# Altium PCB Ender-3.PcbDoc (part 4 of 14)
Units mil, origin at the board's own origin, x right, y up, seen from the top; angles counter-clockwise.
Board outline 3970.48 x 2769.68 mil, 2 copper layers (TopLayer, BottomLayer); 146 components, 136 nets, 669 pads, 614 vias.
Unrouted connection lines stored in the file: 1.
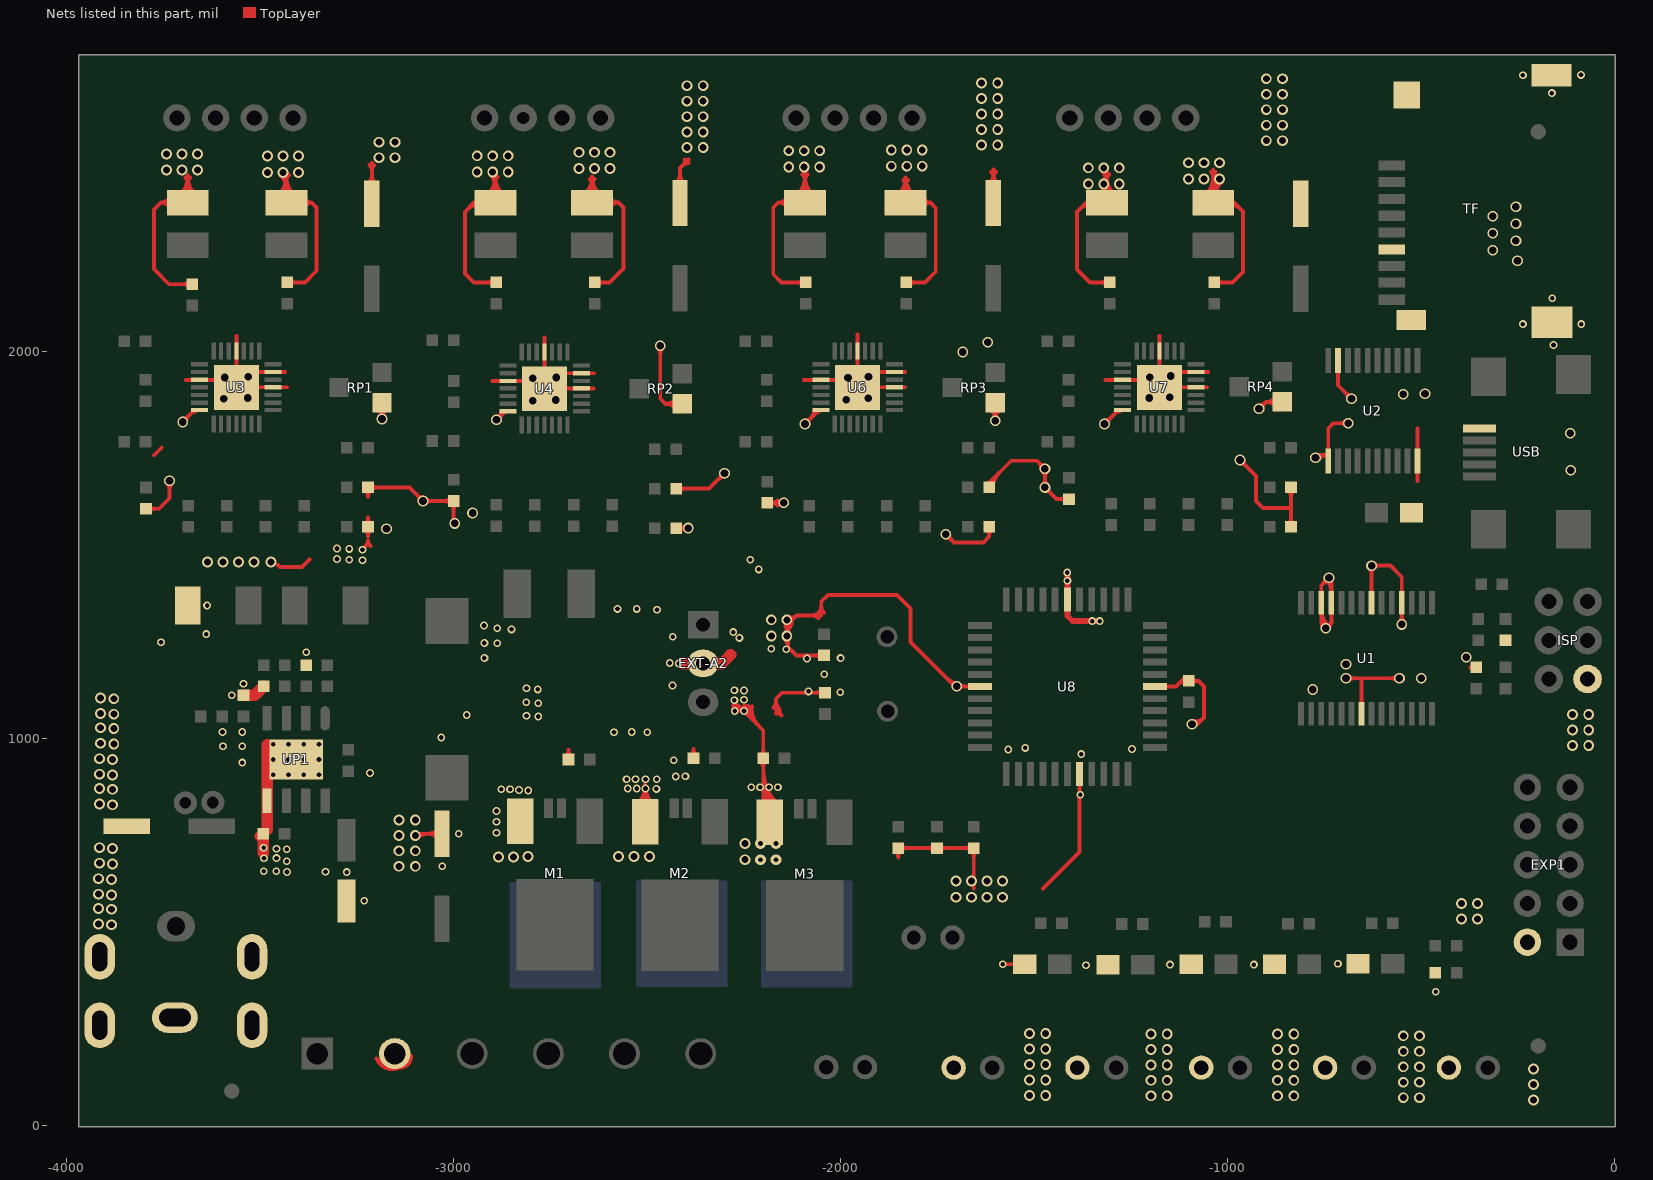
[diagram p4: the nets of this part, all layers, seen from the top]

## Via types
v1: diameter 28, hole 18, TopLayer to BottomLayer, tented both sides, 246 vias
v2: diameter 27.56, hole 19.68, TopLayer to BottomLayer, tented both sides, 196 vias
v3: diameter 20, hole 12, TopLayer to BottomLayer, tented both sides, 124 vias
v4: diameter 27.56, hole 11.81, TopLayer to BottomLayer, tented bottom, 16 vias
v5: diameter 27.56, hole 19.68, TopLayer to BottomLayer, 16 vias
v6: diameter 20, hole 12, TopLayer to BottomLayer, 12 vias
v7: diameter 28, hole 11.81, TopLayer to BottomLayer, tented both sides, 4 vias

## Nets (pads, with @x,y where several pads share a name; then routed paths per layer and width w, separated by ;. In a path a pad name is that pad's centre, name@x,y a point inside that pad or via, vN(x,y) a via of type N, cw(c..) or ccw(c..) an arc to the next point about the centre after c; other vN are vias at no path point) (continued)
GND: (continued)
  TopLayer w10: -2702.54,970.98 ccw(c-2678.39,970.98) R10.2@-2695.46,953.91 ; -2702.54,970.98 ccw(c-2678.39,970.98) R10.2@-2695.46,953.91 ; -2702.54,970.98 ccw(c-2678.39,970.98) R10.2@-2695.46,953.91 ; -2702.54,970.98 ccw(c-2678.39,970.98) R10.2@-2695.46,953.91 ; -2702.54,970.98 ccw(c-2678.39,970.98) R10.2@-2695.46,953.91 ; S4.2@-2661.21,2405.77 ccw(c-2707.69,2452.84) -2641.54,2452.84 ; S4.2@-2661.21,2405.77 ccw(c-2707.69,2452.84) -2641.54,2452.84 ; S4.2@-2661.21,2405.77 ccw(c-2707.69,2452.84) -2641.54,2452.84 ; S4.2@-2661.21,2405.77 ccw(c-2707.69,2452.84) -2641.54,2452.84 ; S4.2@-2661.21,2405.77 ccw(c-2707.69,2452.84) -2641.54,2452.84 ; S4.2@-2661.21,2405.77 ccw(c-2707.69,2452.84) -2641.54,2452.84 ; S4.2@-2661.21,2405.77 ccw(c-2707.69,2452.84) -2641.54,2452.84 ; S4.2@-2661.21,2405.77 ccw(c-2707.69,2452.84) -2641.54,2452.84 ; S4.2@-2661.21,2405.77 ccw(c-2707.69,2452.84) -2641.54,2452.84 ; S4.2@-2654.18,2398.65 ccw(c-2684.06,2428.91) -2641.54,2428.91 ; S4.2@-2654.18,2398.65 ccw(c-2684.06,2428.91) -2641.54,2428.91 ; S4.2@-2654.18,2398.65 ccw(c-2684.06,2428.91) -2641.54,2428.91 ; S4.2@-2654.18,2398.65 ccw(c-2684.06,2428.91) -2641.54,2428.91 ; S4.2@-2654.18,2398.65 ccw(c-2684.06,2428.91) -2641.54,2428.91 ; S4.2@-2654.18,2398.65 ccw(c-2684.06,2428.91) -2641.54,2428.91 ; S4.2@-2654.18,2398.65 ccw(c-2684.06,2428.91) -2641.54,2428.91 ; S4.2@-2654.18,2398.65 ccw(c-2684.06,2428.91) -2641.54,2428.91 ; S4.2@-2654.18,2398.65 ccw(c-2684.06,2428.91) -2641.54,2428.91 ; -2647.74,2446.63 cw(c-2662.73,2431.65) -2641.54,2431.65 ; -2647.74,2446.63 cw(c-2662.73,2431.65) -2641.54,2431.65 ; -2647.74,2446.63 cw(c-2662.73,2431.65) -2641.54,2431.65 ; -2647.74,2446.63 cw(c-2662.73,2431.65) -2641.54,2431.65 ; -2647.74,2446.63 cw(c-2662.73,2431.65) -2641.54,2431.65 ; -2647.74,2446.63 cw(c-2662.73,2431.65) -2641.54,2431.65 ; -2647.74,2446.63 cw(c-2662.73,2431.65) -2641.54,2431.65 ; -2647.74,2446.63 cw(c-2662.73,2431.65) -2641.54,2431.65 ; -2641.54,2428.91 ccw(c-2599.01,2428.91) S4.2@-2628.89,2398.65 ; -2641.54,2428.91 ccw(c-2599.01,2428.91) S4.2@-2628.89,2398.65 ; -2641.54,2428.91 ccw(c-2599.01,2428.91) S4.2@-2628.89,2398.65 ; -2641.54,2428.91 ccw(c-2599.01,2428.91) S4.2@-2628.89,2398.65 ; -2641.54,2428.91 ccw(c-2599.01,2428.91) S4.2@-2628.89,2398.65 ; -2641.54,2428.91 ccw(c-2599.01,2428.91) S4.2@-2628.89,2398.65 ; -2641.54,2428.91 ccw(c-2599.01,2428.91) S4.2@-2628.89,2398.65 ; -2641.54,2428.91 ccw(c-2599.01,2428.91) S4.2@-2628.89,2398.65 ; -2641.54,2428.91 ccw(c-2599.01,2428.91) S4.2@-2628.89,2398.65 ; -2641.54,2431.65 cw(c-2620.34,2431.65) -2635.33,2446.63 ; -2641.54,2431.65 cw(c-2620.34,2431.65) -2635.33,2446.63 ; -2641.54,2431.65 cw(c-2620.34,2431.65) -2635.33,2446.63 ; -2641.54,2431.65 cw(c-2620.34,2431.65) -2635.33,2446.63 ; -2641.54,2431.65 cw(c-2620.34,2431.65) -2635.33,2446.63 ; -2641.54,2431.65 cw(c-2620.34,2431.65) -2635.33,2446.63 ; -2641.54,2431.65 cw(c-2620.34,2431.65) -2635.33,2446.63 ; -2641.54,2431.65 cw(c-2620.34,2431.65) -2635.33,2446.63 ; -2641.54,2452.84 ccw(c-2575.38,2452.84) S4.2@-2621.86,2405.77 ; -2641.54,2452.84 ccw(c-2575.38,2452.84) S4.2@-2621.86,2405.77 ; -2641.54,2452.84 ccw(c-2575.38,2452.84) S4.2@-2621.86,2405.77 ; -2641.54,2452.84 ccw(c-2575.38,2452.84) S4.2@-2621.86,2405.77 ; -2641.54,2452.84 ccw(c-2575.38,2452.84) S4.2@-2621.86,2405.77 ; -2641.54,2452.84 ccw(c-2575.38,2452.84) S4.2@-2621.86,2405.77 ; -2641.54,2452.84 ccw(c-2575.38,2452.84) S4.2@-2621.86,2405.77 ; -2641.54,2452.84 ccw(c-2575.38,2452.84) S4.2@-2621.86,2405.77 ; -2641.54,2452.84 ccw(c-2575.38,2452.84) S4.2@-2621.86,2405.77 ; -2641.54,2452.84 S4.2@-2641.54,2385.84 -2573.54,2385.84 ; C16.2@-2627.46,2172.77 cw(c-2610.39,2155.7) -2610.39,2179.84 ; C16.2@-2627.46,2172.77 cw(c-2610.39,2155.7) -2610.39,2179.84 ; C16.2@-2627.46,2172.77 cw(c-2610.39,2155.7) -2610.39,2179.84 ; C16.2@-2627.46,2172.77 cw(c-2610.39,2155.7) -2610.39,2179.84 ; C16.2@-2627.46,2172.77 cw(c-2610.39,2155.7) -2610.39,2179.84 ; C16.2@-2627.46,2172.77 cw(c-2610.39,2155.7) -2610.39,2179.84 ; C16.2@-2627.46,2172.77 cw(c-2610.39,2155.7) -2610.39,2179.84 ; C16.2@-2627.46,2172.77 cw(c-2610.39,2155.7) -2610.39,2179.84 ; C16.2@-2627.46,2172.77 cw(c-2610.39,2155.7) -2610.39,2179.84 ; C16.2@-2627.46,2186.91 ccw(c-2610.39,2203.98) -2610.39,2179.84 ; C16.2@-2627.46,2186.91 ccw(c-2610.39,2203.98) -2610.39,2179.84 ; C16.2@-2627.46,2186.91 ccw(c-2610.39,2203.98) -2610.39,2179.84 ; C16.2@-2627.46,2186.91 ccw(c-2610.39,2203.98) -2610.39,2179.84 ; C16.2@-2627.46,2186.91 ccw(c-2610.39,2203.98) -2610.39,2179.84 ; C16.2@-2627.46,2186.91 ccw(c-2610.39,2203.98) -2610.39,2179.84 ; C16.2@-2627.46,2186.91 ccw(c-2610.39,2203.98) -2610.39,2179.84 ; C16.2@-2627.46,2186.91 ccw(c-2610.39,2203.98) -2610.39,2179.84 ; C16.2@-2627.46,2186.91 ccw(c-2610.39,2203.98) -2610.39,2179.84 ; S4.2@-2595.91,2372.51 cw(c-2573.54,2360.4) -2573.54,2385.84 ; S4.2@-2595.91,2372.51 cw(c-2573.54,2360.4) -2573.54,2385.84 ; S4.2@-2595.91,2372.51 cw(c-2573.54,2360.4) -2573.54,2385.84 ; S4.2@-2595.91,2372.51 cw(c-2573.54,2360.4) -2573.54,2385.84 ; S4.2@-2595.91,2372.51 cw(c-2573.54,2360.4) -2573.54,2385.84 ; S4.2@-2595.91,2372.51 cw(c-2573.54,2360.4) -2573.54,2385.84 ; S4.2@-2595.91,2372.51 cw(c-2573.54,2360.4) -2573.54,2385.84 ; S4.2@-2595.91,2372.51 cw(c-2573.54,2360.4) -2573.54,2385.84 ; S4.2@-2595.91,2372.51 cw(c-2573.54,2360.4) -2573.54,2385.84 ; S4.2@-2595.91,2399.17 ccw(c-2573.54,2411.29) -2573.54,2385.84 ; S4.2@-2595.91,2399.17 ccw(c-2573.54,2411.29) -2573.54,2385.84 ; S4.2@-2595.91,2399.17 ccw(c-2573.54,2411.29) -2573.54,2385.84 ; S4.2@-2595.91,2399.17 ccw(c-2573.54,2411.29) -2573.54,2385.84 ; S4.2@-2595.91,2399.17 ccw(c-2573.54,2411.29) -2573.54,2385.84 ; S4.2@-2595.91,2399.17 ccw(c-2573.54,2411.29) -2573.54,2385.84 ; S4.2@-2595.91,2399.17 ccw(c-2573.54,2411.29) -2573.54,2385.84 ; S4.2@-2595.91,2399.17 ccw(c-2573.54,2411.29) -2573.54,2385.84 ; S4.2@-2595.91,2399.17 ccw(c-2573.54,2411.29) -2573.54,2385.84 ; M2.3@-2525.04,831.35 ccw(c-2574.55,880.85) v3@-2504.54,880.85 ; M2.3@-2525.04,831.35 ccw(c-2574.55,880.85) v3@-2504.54,880.85 ; M2.3@-2525.04,831.35 ccw(c-2574.55,880.85) v3@-2504.54,880.85 ; M2.3@-2525.04,831.35 ccw(c-2574.55,880.85) v3@-2504.54,880.85 ; M2.3@-2525.04,831.35 ccw(c-2574.55,880.85) v3@-2504.54,880.85 ; M2.3@-2525.04,831.35 ccw(c-2574.55,880.85) v3@-2504.54,880.85 ; M2.3@-2525.04,831.35 ccw(c-2574.55,880.85) v3@-2504.54,880.85 ; M2.3@-2525.04,831.35 ccw(c-2574.55,880.85) v3@-2504.54,880.85 ; M2.3@-2525.04,831.35 ccw(c-2574.55,880.85) v3@-2504.54,880.85 ; M2.3@-2517.97,824.28 ccw(c-2550.41,856.71) -2504.54,856.71 ; M2.3@-2517.97,824.28 ccw(c-2550.41,856.71) -2504.54,856.71 ; M2.3@-2517.97,824.28 ccw(c-2550.41,856.71) -2504.54,856.71 ; M2.3@-2517.97,824.28 ccw(c-2550.41,856.71) -2504.54,856.71 ; M2.3@-2517.97,824.28 ccw(c-2550.41,856.71) -2504.54,856.71 ; M2.3@-2517.97,824.28 ccw(c-2550.41,856.71) -2504.54,856.71 ; M2.3@-2517.97,824.28 ccw(c-2550.41,856.71) -2504.54,856.71 ; M2.3@-2517.97,824.28 ccw(c-2550.41,856.71) -2504.54,856.71 ; M2.3@-2517.97,824.28 ccw(c-2550.41,856.71) -2504.54,856.71 ; -2504.54,856.71 ccw(c-2458.67,856.71) M2.3@-2491.1,824.28 ; -2504.54,856.71 ccw(c-2458.67,856.71) M2.3@-2491.1,824.28 ; -2504.54,856.71 ccw(c-2458.67,856.71) M2.3@-2491.1,824.28 ; -2504.54,856.71 ccw(c-2458.67,856.71) M2.3@-2491.1,824.28 ; -2504.54,856.71 ccw(c-2458.67,856.71) M2.3@-2491.1,824.28 ; -2504.54,856.71 ccw(c-2458.67,856.71) M2.3@-2491.1,824.28 ; -2504.54,856.71 ccw(c-2458.67,856.71) M2.3@-2491.1,824.28 ; -2504.54,856.71 ccw(c-2458.67,856.71) M2.3@-2491.1,824.28 ; -2504.54,856.71 ccw(c-2458.67,856.71) M2.3@-2491.1,824.28 ; v3@-2504.54,880.85 ccw(c-2434.52,880.85) M2.3@-2484.03,831.35 ; v3@-2504.54,880.85 ccw(c-2434.52,880.85) M2.3@-2484.03,831.35 ; v3@-2504.54,880.85 ccw(c-2434.52,880.85) M2.3@-2484.03,831.35 ; v3@-2504.54,880.85 ccw(c-2434.52,880.85) M2.3@-2484.03,831.35 ; v3@-2504.54,880.85 ccw(c-2434.52,880.85) M2.3@-2484.03,831.35 ; v3@-2504.54,880.85 ccw(c-2434.52,880.85) M2.3@-2484.03,831.35 ; v3@-2504.54,880.85 ccw(c-2434.52,880.85) M2.3@-2484.03,831.35 ; v3@-2504.54,880.85 ccw(c-2434.52,880.85) M2.3@-2484.03,831.35 ; v3@-2504.54,880.85 ccw(c-2434.52,880.85) M2.3@-2484.03,831.35 ; v2@-2471.74,2009.63 cw(c-2486.73,1994.65) -2465.54,1994.65 ; v2@-2471.74,2009.63 cw(c-2486.73,1994.65) -2465.54,1994.65 ; v2@-2471.74,2009.63 cw(c-2486.73,1994.65) -2465.54,1994.65 ; v2@-2471.74,2009.63 cw(c-2486.73,1994.65) -2465.54,1994.65 ; v2@-2471.74,2009.63 cw(c-2486.73,1994.65) -2465.54,1994.65 ; v2@-2471.74,2009.63 cw(c-2486.73,1994.65) -2465.54,1994.65 ; v2@-2471.74,2009.63 cw(c-2486.73,1994.65) -2465.54,1994.65 ; v2@-2471.74,2009.63 cw(c-2486.73,1994.65) -2465.54,1994.65 ; v2@-2471.74,2009.63 cw(c-2486.73,1994.65) -2465.54,1994.65 ; -2465.54,1994.65 cw(c-2444.34,1994.65) v2@-2459.33,2009.63 ; -2465.54,1994.65 cw(c-2444.34,1994.65) v2@-2459.33,2009.63 ; -2465.54,1994.65 cw(c-2444.34,1994.65) v2@-2459.33,2009.63 ; -2465.54,1994.65 cw(c-2444.34,1994.65) v2@-2459.33,2009.63 ; -2465.54,1994.65 cw(c-2444.34,1994.65) v2@-2459.33,2009.63 ; -2465.54,1994.65 cw(c-2444.34,1994.65) v2@-2459.33,2009.63 ; -2465.54,1994.65 cw(c-2444.34,1994.65) v2@-2459.33,2009.63 ; -2465.54,1994.65 cw(c-2444.34,1994.65) v2@-2459.33,2009.63 ; -2465.54,1994.65 cw(c-2444.34,1994.65) v2@-2459.33,2009.63 ; -2451.53,1865.84 cw(c-2451.53,1829.62) RP2.2@-2423.83,1852.96 ; -2451.53,1865.84 ccw(c-2451.53,1902.06) RP2.2@-2423.83,1878.73 ; -2451.53,1865.84 cw(c-2451.53,1829.62) RP2.2@-2423.83,1852.96 ; -2451.53,1865.84 ccw(c-2451.53,1902.06) RP2.2@-2423.83,1878.73 ; -2451.53,1865.84 cw(c-2451.53,1829.62) RP2.2@-2423.83,1852.96 ; -2451.53,1865.84 ccw(c-2451.53,1902.06) RP2.2@-2423.83,1878.73 ; -2451.53,1865.84 cw(c-2451.53,1829.62) RP2.2@-2423.83,1852.96 ; -2451.53,1865.84 ccw(c-2451.53,1902.06) RP2.2@-2423.83,1878.73 ; -2451.53,1865.84 cw(c-2451.53,1829.62) RP2.2@-2423.83,1852.96 ; -2451.53,1865.84 ccw(c-2451.53,1902.06) RP2.2@-2423.83,1878.73 ; -2451.53,1865.84 ccw(c-2451.53,1902.06) RP2.2@-2423.83,1878.73 ; -2451.53,1865.84 cw(c-2451.53,1829.62) RP2.2@-2423.83,1852.96 ; -2451.53,1865.84 ccw(c-2451.53,1902.06) RP2.2@-2423.83,1878.73 ; -2451.53,1865.84 cw(c-2451.53,1829.62) RP2.2@-2423.83,1852.96 ; -2451.53,1865.84 ccw(c-2451.53,1902.06) RP2.2@-2423.83,1878.73 ; -2451.53,1865.84 cw(c-2451.53,1829.62) RP2.2@-2423.83,1852.96 ; -2451.53,1865.84 ccw(c-2451.53,1902.06) RP2.2@-2423.83,1878.73 ; -2451.53,1865.84 cw(c-2451.53,1829.62) RP2.2@-2423.83,1852.96 ; C2.2@-2425.14,2435.45 ccw(c-2450.75,2461.06) -2414.54,2461.06 ; C2.2@-2425.14,2435.45 ccw(c-2450.75,2461.06) -2414.54,2461.06 ; C2.2@-2425.14,2435.45 ccw(c-2450.75,2461.06) -2414.54,2461.06 ; C2.2@-2425.14,2435.45 ccw(c-2450.75,2461.06) -2414.54,2461.06 ; C2.2@-2425.14,2435.45 ccw(c-2450.75,2461.06) -2414.54,2461.06 ; C2.2@-2425.14,2435.45 ccw(c-2450.75,2461.06) -2414.54,2461.06 ; C2.2@-2425.14,2435.45 ccw(c-2450.75,2461.06) -2414.54,2461.06 ; C2.2@-2425.14,2435.45 ccw(c-2450.75,2461.06) -2414.54,2461.06 ; C2.2@-2425.14,2435.45 ccw(c-2450.75,2461.06) -2414.54,2461.06 ; R17.2@-2417.46,1537.77 cw(c-2400.39,1520.7) v2@-2400.39,1544.84 ; R17.2@-2417.46,1537.77 cw(c-2400.39,1520.7) v2@-2400.39,1544.84 ; R17.2@-2417.46,1537.77 cw(c-2400.39,1520.7) v2@-2400.39,1544.84 ; R17.2@-2417.46,1537.77 cw(c-2400.39,1520.7) v2@-2400.39,1544.84 ; R17.2@-2417.46,1537.77 cw(c-2400.39,1520.7) v2@-2400.39,1544.84 ; R17.2@-2417.46,1537.77 cw(c-2400.39,1520.7) v2@-2400.39,1544.84 ; R17.2@-2417.46,1537.77 cw(c-2400.39,1520.7) v2@-2400.39,1544.84 ; R17.2@-2417.46,1537.77 cw(c-2400.39,1520.7) v2@-2400.39,1544.84 ; R17.2@-2417.46,1537.77 cw(c-2400.39,1520.7) v2@-2400.39,1544.84 ; R17.2@-2417.46,1551.91 ccw(c-2400.39,1568.98) v2@-2400.39,1544.84 ; R17.2@-2417.46,1551.91 ccw(c-2400.39,1568.98) v2@-2400.39,1544.84 ; R17.2@-2417.46,1551.91 ccw(c-2400.39,1568.98) v2@-2400.39,1544.84 ; R17.2@-2417.46,1551.91 ccw(c-2400.39,1568.98) v2@-2400.39,1544.84 ; R17.2@-2417.46,1551.91 ccw(c-2400.39,1568.98) v2@-2400.39,1544.84 ; R17.2@-2417.46,1551.91 ccw(c-2400.39,1568.98) v2@-2400.39,1544.84 ; R17.2@-2417.46,1551.91 ccw(c-2400.39,1568.98) v2@-2400.39,1544.84 ; R17.2@-2417.46,1551.91 ccw(c-2400.39,1568.98) v2@-2400.39,1544.84 ; R17.2@-2417.46,1551.91 ccw(c-2400.39,1568.98) v2@-2400.39,1544.84 ; C17.2@-2417.46,1639.77 cw(c-2400.39,1622.7) -2400.39,1646.84 ; C17.2@-2417.46,1639.77 cw(c-2400.39,1622.7) -2400.39,1646.84 ; C17.2@-2417.46,1639.77 cw(c-2400.39,1622.7) -2400.39,1646.84 ; C17.2@-2417.46,1639.77 cw(c-2400.39,1622.7) -2400.39,1646.84 ; C17.2@-2417.46,1639.77 cw(c-2400.39,1622.7) -2400.39,1646.84 ; C17.2@-2417.46,1639.77 cw(c-2400.39,1622.7) -2400.39,1646.84 ; C17.2@-2417.46,1639.77 cw(c-2400.39,1622.7) -2400.39,1646.84 ; C17.2@-2417.46,1639.77 cw(c-2400.39,1622.7) -2400.39,1646.84 ; C17.2@-2417.46,1639.77 cw(c-2400.39,1622.7) -2400.39,1646.84 ; C17.2@-2417.46,1653.91 ccw(c-2400.39,1670.98) -2400.39,1646.84 ; C17.2@-2417.46,1653.91 ccw(c-2400.39,1670.98) -2400.39,1646.84 ; C17.2@-2417.46,1653.91 ccw(c-2400.39,1670.98) -2400.39,1646.84 ; C17.2@-2417.46,1653.91 ccw(c-2400.39,1670.98) -2400.39,1646.84 ; C17.2@-2417.46,1653.91 ccw(c-2400.39,1670.98) -2400.39,1646.84 ; C17.2@-2417.46,1653.91 ccw(c-2400.39,1670.98) -2400.39,1646.84 ; C17.2@-2417.46,1653.91 ccw(c-2400.39,1670.98) -2400.39,1646.84 ; C17.2@-2417.46,1653.91 ccw(c-2400.39,1670.98) -2400.39,1646.84 ; C17.2@-2417.46,1653.91 ccw(c-2400.39,1670.98) -2400.39,1646.84 ; R17.2@-2414.73,1544.84 cw(c-2414.73,1523.65) v2@-2399.74,1538.63 ; R17.2@-2414.73,1544.84 ccw(c-2414.73,1566.04) v2@-2399.74,1551.05 ; R17.2@-2414.73,1544.84 cw(c-2414.73,1523.65) v2@-2399.74,1538.63 ; R17.2@-2414.73,1544.84 ccw(c-2414.73,1566.04) v2@-2399.74,1551.05 ; R17.2@-2414.73,1544.84 cw(c-2414.73,1523.65) v2@-2399.74,1538.63 ; R17.2@-2414.73,1544.84 ccw(c-2414.73,1566.04) v2@-2399.74,1551.05 ; R17.2@-2414.73,1544.84 cw(c-2414.73,1523.65) v2@-2399.74,1538.63 ; R17.2@-2414.73,1544.84 ccw(c-2414.73,1566.04) v2@-2399.74,1551.05 ; R17.2@-2414.73,1544.84 cw(c-2414.73,1523.65) v2@-2399.74,1538.63 ; R17.2@-2414.73,1544.84 ccw(c-2414.73,1566.04) v2@-2399.74,1551.05 ; R17.2@-2414.73,1544.84 ccw(c-2414.73,1566.04) v2@-2399.74,1551.05 ; R17.2@-2414.73,1544.84 cw(c-2414.73,1523.65) v2@-2399.74,1538.63 ; R17.2@-2414.73,1544.84 ccw(c-2414.73,1566.04) v2@-2399.74,1551.05 ; R17.2@-2414.73,1544.84 cw(c-2414.73,1523.65) v2@-2399.74,1538.63 ; R17.2@-2414.73,1544.84 ccw(c-2414.73,1566.04) v2@-2399.74,1551.05 ; R17.2@-2414.73,1544.84 cw(c-2414.73,1523.65) v2@-2399.74,1538.63 ; R17.2@-2414.73,1544.84 ccw(c-2414.73,1566.04) v2@-2399.74,1551.05 ; R17.2@-2414.73,1544.84 cw(c-2414.73,1523.65) v2@-2399.74,1538.63 ; -2414.54,2461.06 ccw(c-2378.32,2461.06) C2.2@-2403.93,2435.45 ; -2414.54,2461.06 ccw(c-2378.32,2461.06) C2.2@-2403.93,2435.45 ; -2414.54,2461.06 ccw(c-2378.32,2461.06) C2.2@-2403.93,2435.45 ; -2414.54,2461.06 ccw(c-2378.32,2461.06) C2.2@-2403.93,2435.45 ; -2414.54,2461.06 ccw(c-2378.32,2461.06) C2.2@-2403.93,2435.45 ; -2414.54,2461.06 ccw(c-2378.32,2461.06) C2.2@-2403.93,2435.45 ; -2414.54,2461.06 ccw(c-2378.32,2461.06) C2.2@-2403.93,2435.45 ; -2414.54,2461.06 ccw(c-2378.32,2461.06) C2.2@-2403.93,2435.45 ; -2414.54,2461.06 ccw(c-2378.32,2461.06) C2.2@-2403.93,2435.45 ; -2407.52,2481.85 cw(c-2392.54,2466.87) -2392.54,2488.06 ; -2407.52,2481.85 ccw(c-2422.51,2496.84) -2401.31,2496.84 ; -2407.52,2481.85 cw(c-2392.54,2466.87) -2392.54,2488.06 ; -2407.52,2481.85 ccw(c-2422.51,2496.84) -2401.31,2496.84 ; -2407.52,2481.85 cw(c-2392.54,2466.87) -2392.54,2488.06 ; -2407.52,2481.85 ccw(c-2422.51,2496.84) -2401.31,2496.84 ; -2407.52,2481.85 cw(c-2392.54,2466.87) -2392.54,2488.06 ; -2407.52,2481.85 ccw(c-2422.51,2496.84) -2401.31,2496.84 ; -2407.52,2481.85 cw(c-2392.54,2466.87) -2392.54,2488.06 ; -2407.52,2481.85 ccw(c-2422.51,2496.84) -2401.31,2496.84 ; -2407.52,2481.85 ccw(c-2422.51,2496.84) -2401.31,2496.84 ; -2407.52,2481.85 cw(c-2392.54,2466.87) -2392.54,2488.06 ; -2407.52,2481.85 ccw(c-2422.51,2496.84) -2401.31,2496.84 ; -2407.52,2481.85 cw(c-2392.54,2466.87) -2392.54,2488.06 ; -2407.52,2481.85 ccw(c-2422.51,2496.84) -2401.31,2496.84 ; -2407.52,2481.85 cw(c-2392.54,2466.87) -2392.54,2488.06 ; R11.2@-2386.61,956.91 ccw(c-2403.68,973.98) -2379.54,973.98 ; R11.2@-2386.61,956.91 ccw(c-2403.68,973.98) -2379.54,973.98 ; R11.2@-2386.61,956.91 ccw(c-2403.68,973.98) -2379.54,973.98 ; R11.2@-2386.61,956.91 ccw(c-2403.68,973.98) -2379.54,973.98 ; R11.2@-2386.61,956.91 ccw(c-2403.68,973.98) -2379.54,973.98 ; R11.2@-2386.61,956.91 ccw(c-2403.68,973.98) -2379.54,973.98 ; R11.2@-2386.61,956.91 ccw(c-2403.68,973.98) -2379.54,973.98 ; R11.2@-2386.61,956.91 ccw(c-2403.68,973.98) -2379.54,973.98 ; R11.2@-2386.61,956.91 ccw(c-2403.68,973.98) -2379.54,973.98 ; -2379.54,973.98 ccw(c-2355.39,973.98) R11.2@-2372.46,956.91 ; -2379.54,973.98 ccw(c-2355.39,973.98) R11.2@-2372.46,956.91 ; -2379.54,973.98 ccw(c-2355.39,973.98) R11.2@-2372.46,956.91 ; -2379.54,973.98 ccw(c-2355.39,973.98) R11.2@-2372.46,956.91 ; -2379.54,973.98 ccw(c-2355.39,973.98) R11.2@-2372.46,956.91 ; -2379.54,973.98 ccw(c-2355.39,973.98) R11.2@-2372.46,956.91 ; -2379.54,973.98 ccw(c-2355.39,973.98) R11.2@-2372.46,956.91 ; -2379.54,973.98 ccw(c-2355.39,973.98) R11.2@-2372.46,956.91 ; -2379.54,973.98 ccw(c-2355.39,973.98) R11.2@-2372.46,956.91 ; -2314.52,1671.85 cw(c-2299.54,1656.87) v2@-2299.54,1678.06 ; -2314.52,1671.85 ccw(c-2329.51,1686.84) v2@-2308.31,1686.84 ; -2314.52,1671.85 cw(c-2299.54,1656.87) v2@-2299.54,1678.06 ; -2314.52,1671.85 ccw(c-2329.51,1686.84) v2@-2308.31,1686.84 ; -2314.52,1671.85 cw(c-2299.54,1656.87) v2@-2299.54,1678.06 ; -2314.52,1671.85 ccw(c-2329.51,1686.84) v2@-2308.31,1686.84 ; -2314.52,1671.85 cw(c-2299.54,1656.87) v2@-2299.54,1678.06 ; -2314.52,1671.85 ccw(c-2329.51,1686.84) v2@-2308.31,1686.84 ; -2314.52,1671.85 cw(c-2299.54,1656.87) v2@-2299.54,1678.06 ; -2314.52,1671.85 ccw(c-2329.51,1686.84) v2@-2308.31,1686.84 ; -2314.52,1671.85 ccw(c-2329.51,1686.84) v2@-2308.31,1686.84 ; -2314.52,1671.85 cw(c-2299.54,1656.87) v2@-2299.54,1678.06 ; -2314.52,1671.85 ccw(c-2329.51,1686.84) v2@-2308.31,1686.84 ; -2314.52,1671.85 cw(c-2299.54,1656.87) v2@-2299.54,1678.06 ; -2314.52,1671.85 ccw(c-2329.51,1686.84) v2@-2308.31,1686.84 ; -2314.52,1671.85 cw(c-2299.54,1656.87) v2@-2299.54,1678.06 ; -2314.52,1671.85 ccw(c-2329.51,1686.84) v2@-2308.31,1686.84 ; -2314.52,1671.85 cw(c-2299.54,1656.87) v2@-2299.54,1678.06 ; -2259.54,1073.06 cw(c-2259.54,1051.87) v3@-2244.55,1066.85 ; -2259.54,1073.06 cw(c-2259.54,1051.87) v3@-2244.55,1066.85 ; -2259.54,1073.06 cw(c-2259.54,1051.87) v3@-2244.55,1066.85 ; -2259.54,1073.06 cw(c-2259.54,1051.87) v3@-2244.55,1066.85 ; -2259.54,1073.06 cw(c-2259.54,1051.87) v3@-2244.55,1066.85 ; -2259.54,1073.06 cw(c-2259.54,1051.87) v3@-2244.55,1066.85 ; -2259.54,1073.06 cw(c-2259.54,1051.87) v3@-2244.55,1066.85 ; -2259.54,1073.06 cw(c-2259.54,1051.87) v3@-2244.55,1066.85 ; -2250.76,1081.84 ccw(c-2229.56,1081.84) v3@-2244.55,1066.85 ; -2250.76,1081.84 ccw(c-2229.56,1081.84) v3@-2244.55,1066.85 ; -2250.76,1081.84 ccw(c-2229.56,1081.84) v3@-2244.55,1066.85 ; -2250.76,1081.84 ccw(c-2229.56,1081.84) v3@-2244.55,1066.85 ; -2250.76,1081.84 ccw(c-2229.56,1081.84) v3@-2244.55,1066.85 ; -2250.76,1081.84 ccw(c-2229.56,1081.84) v3@-2244.55,1066.85 ; -2250.76,1081.84 ccw(c-2229.56,1081.84) v3@-2244.55,1066.85 ; -2250.76,1081.84 ccw(c-2229.56,1081.84) v3@-2244.55,1066.85 ; R12.2@-2206.61,942.77 cw(c-2223.68,925.7) -2199.54,925.7 ; R12.2@-2206.61,942.77 cw(c-2223.68,925.7) -2199.54,925.7 ; R12.2@-2206.61,942.77 cw(c-2223.68,925.7) -2199.54,925.7 ; R12.2@-2206.61,942.77 cw(c-2223.68,925.7) -2199.54,925.7 ; R12.2@-2206.61,942.77 cw(c-2223.68,925.7) -2199.54,925.7 ; R12.2@-2206.61,942.77 cw(c-2223.68,925.7) -2199.54,925.7 ; R12.2@-2206.61,942.77 cw(c-2223.68,925.7) -2199.54,925.7 ; R12.2@-2206.61,942.77 cw(c-2223.68,925.7) -2199.54,925.7 ; R12.2@-2206.61,942.77 cw(c-2223.68,925.7) -2199.54,925.7 ; R12.2@-2206.61,956.91 ccw(c-2223.68,973.98) -2199.54,973.98 ; R12.2@-2206.61,956.91 ccw(c-2223.68,973.98) -2199.54,973.98 ; R12.2@-2206.61,956.91 ccw(c-2223.68,973.98) -2199.54,973.98 ; R12.2@-2206.61,956.91 ccw(c-2223.68,973.98) -2199.54,973.98 ; R12.2@-2206.61,956.91 ccw(c-2223.68,973.98) -2199.54,973.98 ; R12.2@-2206.61,956.91 ccw(c-2223.68,973.98) -2199.54,973.98 ; R12.2@-2206.61,956.91 ccw(c-2223.68,973.98) -2199.54,973.98 ; R12.2@-2206.61,956.91 ccw(c-2223.68,973.98) -2199.54,973.98 ; R12.2@-2206.61,956.91 ccw(c-2223.68,973.98) -2199.54,973.98 ; -2199.54,848.47 ccw(c-2143.91,848.47) M3.3@-2183.24,809.14 ; -2199.54,848.47 ccw(c-2143.91,848.47) M3.3@-2183.24,809.14 ; -2199.54,848.47 ccw(c-2143.91,848.47) M3.3@-2183.24,809.14 ; -2199.54,848.47 ccw(c-2143.91,848.47) M3.3@-2183.24,809.14 ; -2199.54,848.47 ccw(c-2143.91,848.47) M3.3@-2183.24,809.14 ; -2199.54,848.47 ccw(c-2143.91,848.47) M3.3@-2183.24,809.14 ; -2199.54,848.47 ccw(c-2143.91,848.47) M3.3@-2183.24,809.14 ; -2199.54,848.47 ccw(c-2143.91,848.47) M3.3@-2183.24,809.14 ; -2199.54,848.47 ccw(c-2143.91,848.47) M3.3@-2183.24,809.14 ; v3@-2199.54,872.61 ccw(c-2119.77,872.61) M3.3@-2176.17,816.21 ; v3@-2199.54,872.61 ccw(c-2119.77,872.61) M3.3@-2176.17,816.21 ; v3@-2199.54,872.61 ccw(c-2119.77,872.61) M3.3@-2176.17,816.21 ; v3@-2199.54,872.61 ccw(c-2119.77,872.61) M3.3@-2176.17,816.21 ; v3@-2199.54,872.61 ccw(c-2119.77,872.61) M3.3@-2176.17,816.21 ; v3@-2199.54,872.61 ccw(c-2119.77,872.61) M3.3@-2176.17,816.21 ; v3@-2199.54,872.61 ccw(c-2119.77,872.61) M3.3@-2176.17,816.21 ; v3@-2199.54,872.61 ccw(c-2119.77,872.61) M3.3@-2176.17,816.21 ; v3@-2199.54,872.61 ccw(c-2119.77,872.61) M3.3@-2176.17,816.21 ; -2199.54,896.75 ccw(c-2095.62,896.75) M3.3@-2169.1,823.28 ; -2199.54,896.75 ccw(c-2095.62,896.75) M3.3@-2169.1,823.28 ; -2199.54,896.75 ccw(c-2095.62,896.75) M3.3@-2169.1,823.28 ; -2199.54,896.75 ccw(c-2095.62,896.75) M3.3@-2169.1,823.28 ; -2199.54,896.75 ccw(c-2095.62,896.75) M3.3@-2169.1,823.28 ; -2199.54,896.75 ccw(c-2095.62,896.75) M3.3@-2169.1,823.28 ; -2199.54,896.75 ccw(c-2095.62,896.75) M3.3@-2169.1,823.28 ; -2199.54,896.75 ccw(c-2095.62,896.75) M3.3@-2169.1,823.28 ; -2199.54,896.75 ccw(c-2095.62,896.75) M3.3@-2169.1,823.28 ; -2199.54,920.9 ccw(c-2071.48,920.9) M3.3@-2162.03,830.35 ; -2199.54,920.9 ccw(c-2071.48,920.9) M3.3@-2162.03,830.35 ; -2199.54,920.9 ccw(c-2071.48,920.9) M3.3@-2162.03,830.35 ; -2199.54,920.9 ccw(c-2071.48,920.9) M3.3@-2162.03,830.35 ; -2199.54,920.9 ccw(c-2071.48,920.9) M3.3@-2162.03,830.35 ; -2199.54,920.9 ccw(c-2071.48,920.9) M3.3@-2162.03,830.35 ; -2199.54,920.9 ccw(c-2071.48,920.9) M3.3@-2162.03,830.35 ; -2199.54,920.9 ccw(c-2071.48,920.9) M3.3@-2162.03,830.35 ; -2199.54,920.9 ccw(c-2071.48,920.9) M3.3@-2162.03,830.35 ; -2199.54,925.7 cw(c-2175.39,925.7) R12.2@-2192.46,942.77 ; -2199.54,925.7 cw(c-2175.39,925.7) R12.2@-2192.46,942.77 ; -2199.54,925.7 cw(c-2175.39,925.7) R12.2@-2192.46,942.77 ; -2199.54,925.7 cw(c-2175.39,925.7) R12.2@-2192.46,942.77 ; -2199.54,925.7 cw(c-2175.39,925.7) R12.2@-2192.46,942.77 ; -2199.54,925.7 cw(c-2175.39,925.7) R12.2@-2192.46,942.77 ; -2199.54,925.7 cw(c-2175.39,925.7) R12.2@-2192.46,942.77 ; -2199.54,925.7 cw(c-2175.39,925.7) R12.2@-2192.46,942.77 ; -2199.54,925.7 cw(c-2175.39,925.7) R12.2@-2192.46,942.77 ; -2199.54,973.98 ccw(c-2175.39,973.98) R12.2@-2192.46,956.91 ; -2199.54,973.98 ccw(c-2175.39,973.98) R12.2@-2192.46,956.91 ; -2199.54,973.98 ccw(c-2175.39,973.98) R12.2@-2192.46,956.91 ; -2199.54,973.98 ccw(c-2175.39,973.98) R12.2@-2192.46,956.91 ; -2199.54,973.98 ccw(c-2175.39,973.98) R12.2@-2192.46,956.91 ; -2199.54,973.98 ccw(c-2175.39,973.98) R12.2@-2192.46,956.91 ; -2199.54,973.98 ccw(c-2175.39,973.98) R12.2@-2192.46,956.91 ; -2199.54,973.98 ccw(c-2175.39,973.98) R12.2@-2192.46,956.91 ; -2199.54,973.98 ccw(c-2175.39,973.98) R12.2@-2192.46,956.91 ; C38.2@-2182.46,1602.77 cw(c-2165.39,1585.7) -2165.39,1609.84 ; C38.2@-2182.46,1602.77 cw(c-2165.39,1585.7) -2165.39,1609.84 ; C38.2@-2182.46,1602.77 cw(c-2165.39,1585.7) -2165.39,1609.84 ; C38.2@-2182.46,1602.77 cw(c-2165.39,1585.7) -2165.39,1609.84 ; C38.2@-2182.46,1602.77 cw(c-2165.39,1585.7) -2165.39,1609.84 ; C38.2@-2182.46,1602.77 cw(c-2165.39,1585.7) -2165.39,1609.84 ; C38.2@-2182.46,1602.77 cw(c-2165.39,1585.7) -2165.39,1609.84 ; C38.2@-2182.46,1602.77 cw(c-2165.39,1585.7) -2165.39,1609.84 ; C38.2@-2182.46,1602.77 cw(c-2165.39,1585.7) -2165.39,1609.84 ; C38.2@-2182.46,1616.91 ccw(c-2165.39,1633.98) -2165.39,1609.84 ; C38.2@-2182.46,1616.91 ccw(c-2165.39,1633.98) -2165.39,1609.84 ; C38.2@-2182.46,1616.91 ccw(c-2165.39,1633.98) -2165.39,1609.84 ; C38.2@-2182.46,1616.91 ccw(c-2165.39,1633.98) -2165.39,1609.84 ; C38.2@-2182.46,1616.91 ccw(c-2165.39,1633.98) -2165.39,1609.84 ; C38.2@-2182.46,1616.91 ccw(c-2165.39,1633.98) -2165.39,1609.84 ; C38.2@-2182.46,1616.91 ccw(c-2165.39,1633.98) -2165.39,1609.84 ; C38.2@-2182.46,1616.91 ccw(c-2165.39,1633.98) -2165.39,1609.84 ; C38.2@-2182.46,1616.91 ccw(c-2165.39,1633.98) -2165.39,1609.84 ; C38.2@-2177.73,1609.84 cw(c-2177.73,1588.65) -2162.74,1603.63 ccw(c-2177.73,1588.65) C38.2@-2177.73,1609.84 ; C38.2@-2177.73,1609.84 ccw(c-2177.73,1631.04) -2162.74,1616.05 cw(c-2177.73,1631.04) C38.2@-2177.73,1609.84 ; -2172.74,1081.05 ccw(c-2187.73,1096.04) -2166.54,1096.04 ; -2172.74,1081.05 ccw(c-2187.73,1096.04) -2166.54,1096.04 ; -2172.74,1081.05 ccw(c-2187.73,1096.04) -2166.54,1096.04 ; -2172.74,1081.05 ccw(c-2187.73,1096.04) -2166.54,1096.04 ; -2172.74,1081.05 ccw(c-2187.73,1096.04) -2166.54,1096.04 ; -2172.74,1081.05 ccw(c-2187.73,1096.04) -2166.54,1096.04 ; -2167.73,1609.84 cw(c-2167.73,1588.65) v2@-2152.74,1603.63 ; -2167.73,1609.84 ccw(c-2167.73,1631.04) v2@-2152.74,1616.05 ; -2167.73,1609.84 cw(c-2167.73,1588.65) v2@-2152.74,1603.63 ; -2167.73,1609.84 ccw(c-2167.73,1631.04) v2@-2152.74,1616.05 ; -2167.73,1609.84 cw(c-2167.73,1588.65) v2@-2152.74,1603.63 ; -2167.73,1609.84 ccw(c-2167.73,1631.04) v2@-2152.74,1616.05 ; -2167.73,1609.84 cw(c-2167.73,1588.65) v2@-2152.74,1603.63 ; -2167.73,1609.84 ccw(c-2167.73,1631.04) v2@-2152.74,1616.05 ; -2167.73,1609.84 ccw(c-2167.73,1631.04) v2@-2152.74,1616.05 ; -2167.73,1609.84 cw(c-2167.73,1588.65) v2@-2152.74,1603.63 ; -2167.73,1609.84 ccw(c-2167.73,1631.04) v2@-2152.74,1616.05 ; -2167.73,1609.84 cw(c-2167.73,1588.65) v2@-2152.74,1603.63 ; -2167.73,1609.84 ccw(c-2167.73,1631.04) v2@-2152.74,1616.05 ; -2167.73,1609.84 cw(c-2167.73,1588.65) v2@-2152.74,1603.63 ; -2166.54,1096.04 ccw(c-2145.34,1096.04) -2160.33,1081.05 ; -2166.54,1096.04 ccw(c-2145.34,1096.04) -2160.33,1081.05 ; -2166.54,1096.04 ccw(c-2145.34,1096.04) -2160.33,1081.05 ; -2166.54,1096.04 ccw(c-2145.34,1096.04) -2160.33,1081.05 ; -2166.54,1096.04 ccw(c-2145.34,1096.04) -2160.33,1081.05 ; -2166.54,1096.04 ccw(c-2145.34,1096.04) -2160.33,1081.05 ; -2160.53,2385.84 cw(c-2160.53,2358.7) S5.2@-2136.91,2372.06 ; -2160.53,2385.84 ccw(c-2160.53,2412.98) S5.2@-2136.91,2399.62 ; -2160.53,2385.84 cw(c-2160.53,2358.7) S5.2@-2136.91,2372.06 ; -2160.53,2385.84 ccw(c-2160.53,2412.98) S5.2@-2136.91,2399.62 ; -2160.53,2385.84 cw(c-2160.53,2358.7) S5.2@-2136.91,2372.06 ; -2160.53,2385.84 ccw(c-2160.53,2412.98) S5.2@-2136.91,2399.62 ; -2160.53,2385.84 cw(c-2160.53,2358.7) S5.2@-2136.91,2372.06 ; -2160.53,2385.84 ccw(c-2160.53,2412.98) S5.2@-2136.91,2399.62 ; -2160.53,2385.84 cw(c-2160.53,2358.7) S5.2@-2136.91,2372.06 ; -2160.53,2385.84 ccw(c-2160.53,2412.98) S5.2@-2136.91,2399.62 ; -2160.53,2385.84 ccw(c-2160.53,2412.98) S5.2@-2136.91,2399.62 ; -2160.53,2385.84 cw(c-2160.53,2358.7) S5.2@-2136.91,2372.06 ; -2160.53,2385.84 ccw(c-2160.53,2412.98) S5.2@-2136.91,2399.62 ; -2160.53,2385.84 cw(c-2160.53,2358.7) S5.2@-2136.91,2372.06 ; -2160.53,2385.84 ccw(c-2160.53,2412.98) S5.2@-2136.91,2399.62 ; -2160.53,2385.84 cw(c-2160.53,2358.7) S5.2@-2136.91,2372.06 ; -2160.53,2385.84 ccw(c-2160.53,2412.98) S5.2@-2136.91,2399.62 ; -2160.53,2385.84 cw(c-2160.53,2358.7) S5.2@-2136.91,2372.06 ; -2151.55,1059.85 cw(c-2136.56,1074.84) -2157.76,1074.84 ccw(c-2136.56,1074.84) -2151.55,1059.85 ; -2151.55,1059.85 ccw(c-2166.54,1044.87) -2166.54,1066.06 cw(c-2166.54,1044.87) -2151.55,1059.85 ; -2141.74,1290.63 cw(c-2156.73,1275.65) v1@-2135.54,1275.65 ; -2141.74,1290.63 cw(c-2156.73,1275.65) v1@-2135.54,1275.65 ; -2141.74,1290.63 cw(c-2156.73,1275.65) v1@-2135.54,1275.65 ; -2141.74,1290.63 cw(c-2156.73,1275.65) v1@-2135.54,1275.65 ; -2141.74,1290.63 cw(c-2156.73,1275.65) v1@-2135.54,1275.65 ; -2141.74,1290.63 cw(c-2156.73,1275.65) v1@-2135.54,1275.65 ; v1@-2135.54,1275.65 cw(c-2114.34,1275.65) -2129.33,1290.63 ; v1@-2135.54,1275.65 cw(c-2114.34,1275.65) -2129.33,1290.63 ; v1@-2135.54,1275.65 cw(c-2114.34,1275.65) -2129.33,1290.63 ; v1@-2135.54,1275.65 cw(c-2114.34,1275.65) -2129.33,1290.63 ; v1@-2135.54,1275.65 cw(c-2114.34,1275.65) -2129.33,1290.63 ; v1@-2135.54,1275.65 cw(c-2114.34,1275.65) -2129.33,1290.63 ; v1@-2135.54,1305.62 ccw(c-2135.54,1326.82) -2120.55,1311.83 ; v1@-2135.54,1305.62 ccw(c-2135.54,1326.82) -2120.55,1311.83 ; v1@-2135.54,1305.62 ccw(c-2135.54,1326.82) -2120.55,1311.83 ; v1@-2135.54,1305.62 ccw(c-2135.54,1326.82) -2120.55,1311.83 ; v1@-2135.54,1305.62 ccw(c-2135.54,1326.82) -2120.55,1311.83 ; v1@-2135.54,1305.62 ccw(c-2135.54,1326.82) -2120.55,1311.83 ; v1@-2135.54,1305.62 ccw(c-2135.54,1326.82) -2120.55,1311.83 ; v1@-2135.54,1305.62 ccw(c-2135.54,1326.82) -2120.55,1311.83 ; -2126.76,1296.84 cw(c-2105.56,1296.84) -2120.55,1311.83 ; -2126.76,1296.84 cw(c-2105.56,1296.84) -2120.55,1311.83 ; -2126.76,1296.84 cw(c-2105.56,1296.84) -2120.55,1311.83 ; -2126.76,1296.84 cw(c-2105.56,1296.84) -2120.55,1311.83 ; -2126.76,1296.84 cw(c-2105.56,1296.84) -2120.55,1311.83 ; -2126.76,1296.84 cw(c-2105.56,1296.84) -2120.55,1311.83 ; -2126.76,1296.84 cw(c-2105.56,1296.84) -2120.55,1311.83 ; -2126.76,1296.84 cw(c-2105.56,1296.84) -2120.55,1311.83 ; -2113.68,2179.84 cw(c-2113.68,2155.7) C19.1@-2096.61,2172.77 ; -2113.68,2179.84 ccw(c-2113.68,2203.98) C19.1@-2096.61,2186.91 ; -2113.68,2179.84 cw(c-2113.68,2155.7) C19.1@-2096.61,2172.77 ; -2113.68,2179.84 ccw(c-2113.68,2203.98) C19.1@-2096.61,2186.91 ; -2113.68,2179.84 cw(c-2113.68,2155.7) C19.1@-2096.61,2172.77 ; -2113.68,2179.84 ccw(c-2113.68,2203.98) C19.1@-2096.61,2186.91 ; -2113.68,2179.84 cw(c-2113.68,2155.7) C19.1@-2096.61,2172.77 ; -2113.68,2179.84 ccw(c-2113.68,2203.98) C19.1@-2096.61,2186.91 ; -2113.68,2179.84 cw(c-2113.68,2155.7) C19.1@-2096.61,2172.77 ; -2113.68,2179.84 ccw(c-2113.68,2203.98) C19.1@-2096.61,2186.91 ; -2113.68,2179.84 ccw(c-2113.68,2203.98) C19.1@-2096.61,2186.91 ; -2113.68,2179.84 cw(c-2113.68,2155.7) C19.1@-2096.61,2172.77 ; -2113.68,2179.84 ccw(c-2113.68,2203.98) C19.1@-2096.61,2186.91 ; -2113.68,2179.84 cw(c-2113.68,2155.7) C19.1@-2096.61,2172.77 ; -2113.68,2179.84 ccw(c-2113.68,2203.98) C19.1@-2096.61,2186.91 ; -2113.68,2179.84 cw(c-2113.68,2155.7) C19.1@-2096.61,2172.77 ; -2113.68,2179.84 ccw(c-2113.68,2203.98) C19.1@-2096.61,2186.91 ; -2113.68,2179.84 cw(c-2113.68,2155.7) C19.1@-2096.61,2172.77 ; S5.2@-2111.33,2405.64 ccw(c-2159.13,2453.44) -2091.54,2453.44 ; S5.2@-2111.33,2405.64 ccw(c-2159.13,2453.44) -2091.54,2453.44 ; S5.2@-2111.33,2405.64 ccw(c-2159.13,2453.44) -2091.54,2453.44 ; S5.2@-2111.33,2405.64 ccw(c-2159.13,2453.44) -2091.54,2453.44 ; S5.2@-2111.33,2405.64 ccw(c-2159.13,2453.44) -2091.54,2453.44 ; S5.2@-2111.33,2405.64 ccw(c-2159.13,2453.44) -2091.54,2453.44 ; S5.2@-2111.33,2405.64 ccw(c-2159.13,2453.44) -2091.54,2453.44 ; S5.2@-2111.33,2405.64 ccw(c-2159.13,2453.44) -2091.54,2453.44 ; S5.2@-2111.33,2405.64 ccw(c-2159.13,2453.44) -2091.54,2453.44 ; S5.2@-2104.26,2398.57 ccw(c-2134.99,2429.3) -2091.54,2429.3 ; S5.2@-2104.26,2398.57 ccw(c-2134.99,2429.3) -2091.54,2429.3 ; S5.2@-2104.26,2398.57 ccw(c-2134.99,2429.3) -2091.54,2429.3 ; S5.2@-2104.26,2398.57 ccw(c-2134.99,2429.3) -2091.54,2429.3 ; S5.2@-2104.26,2398.57 ccw(c-2134.99,2429.3) -2091.54,2429.3 ; S5.2@-2104.26,2398.57 ccw(c-2134.99,2429.3) -2091.54,2429.3 ; S5.2@-2104.26,2398.57 ccw(c-2134.99,2429.3) -2091.54,2429.3 ; S5.2@-2104.26,2398.57 ccw(c-2134.99,2429.3) -2091.54,2429.3 ; S5.2@-2104.26,2398.57 ccw(c-2134.99,2429.3) -2091.54,2429.3 ; -2097.74,2458.63 cw(c-2112.73,2443.65) -2091.54,2443.65 ; -2097.74,2458.63 cw(c-2112.73,2443.65) -2091.54,2443.65 ; -2097.74,2458.63 cw(c-2112.73,2443.65) -2091.54,2443.65 ; -2097.74,2458.63 cw(c-2112.73,2443.65) -2091.54,2443.65 ; -2097.74,2458.63 cw(c-2112.73,2443.65) -2091.54,2443.65 ; -2097.74,2458.63 cw(c-2112.73,2443.65) -2091.54,2443.65 ; -2097.74,2458.63 cw(c-2112.73,2443.65) -2091.54,2443.65 ; -2097.74,2458.63 cw(c-2112.73,2443.65) -2091.54,2443.65 ; v2@-2091.54,1822.62 ccw(c-2091.54,1843.82) -2076.55,1828.83 ; v2@-2091.54,1822.62 ccw(c-2091.54,1843.82) -2076.55,1828.83 ; v2@-2091.54,1822.62 ccw(c-2091.54,1843.82) -2076.55,1828.83 ; v2@-2091.54,1822.62 ccw(c-2091.54,1843.82) -2076.55,1828.83 ; v2@-2091.54,1822.62 ccw(c-2091.54,1843.82) -2076.55,1828.83 ; v2@-2091.54,1822.62 ccw(c-2091.54,1843.82) -2076.55,1828.83 ; v2@-2091.54,1822.62 ccw(c-2091.54,1843.82) -2076.55,1828.83 ; v2@-2091.54,1822.62 ccw(c-2091.54,1843.82) -2076.55,1828.83 ; v2@-2091.54,1822.62 ccw(c-2091.54,1843.82) -2076.55,1828.83 ; -2091.54,2429.3 ccw(c-2048.08,2429.3) S5.2@-2078.81,2398.57 ; -2091.54,2429.3 ccw(c-2048.08,2429.3) S5.2@-2078.81,2398.57 ; -2091.54,2429.3 ccw(c-2048.08,2429.3) S5.2@-2078.81,2398.57 ; -2091.54,2429.3 ccw(c-2048.08,2429.3) S5.2@-2078.81,2398.57 ; -2091.54,2429.3 ccw(c-2048.08,2429.3) S5.2@-2078.81,2398.57 ; -2091.54,2429.3 ccw(c-2048.08,2429.3) S5.2@-2078.81,2398.57 ; -2091.54,2429.3 ccw(c-2048.08,2429.3) S5.2@-2078.81,2398.57 ; -2091.54,2429.3 ccw(c-2048.08,2429.3) S5.2@-2078.81,2398.57 ; -2091.54,2429.3 ccw(c-2048.08,2429.3) S5.2@-2078.81,2398.57 ; -2091.54,2443.65 cw(c-2070.34,2443.65) -2085.33,2458.63 ; -2091.54,2443.65 cw(c-2070.34,2443.65) -2085.33,2458.63 ; -2091.54,2443.65 cw(c-2070.34,2443.65) -2085.33,2458.63 ; -2091.54,2443.65 cw(c-2070.34,2443.65) -2085.33,2458.63 ; -2091.54,2443.65 cw(c-2070.34,2443.65) -2085.33,2458.63 ; -2091.54,2443.65 cw(c-2070.34,2443.65) -2085.33,2458.63 ; -2091.54,2443.65 cw(c-2070.34,2443.65) -2085.33,2458.63 ; -2091.54,2443.65 cw(c-2070.34,2443.65) -2085.33,2458.63 ; -2091.54,2453.44 ccw(c-2023.94,2453.44) S5.2@-2071.74,2405.64 ; -2091.54,2453.44 ccw(c-2023.94,2453.44) S5.2@-2071.74,2405.64 ; -2091.54,2453.44 ccw(c-2023.94,2453.44) S5.2@-2071.74,2405.64 ; -2091.54,2453.44 ccw(c-2023.94,2453.44) S5.2@-2071.74,2405.64 ; -2091.54,2453.44 ccw(c-2023.94,2453.44) S5.2@-2071.74,2405.64 ; -2091.54,2453.44 ccw(c-2023.94,2453.44) S5.2@-2071.74,2405.64 ; -2091.54,2453.44 ccw(c-2023.94,2453.44) S5.2@-2071.74,2405.64 ; -2091.54,2453.44 ccw(c-2023.94,2453.44) S5.2@-2071.74,2405.64 ; -2091.54,2453.44 ccw(c-2023.94,2453.44) S5.2@-2071.74,2405.64 ; v2@-2082.76,1813.84 cw(c-2061.56,1813.84) -2076.55,1828.83 ; v2@-2082.76,1813.84 cw(c-2061.56,1813.84) -2076.55,1828.83 ; v2@-2082.76,1813.84 cw(c-2061.56,1813.84) -2076.55,1828.83 ; v2@-2082.76,1813.84 cw(c-2061.56,1813.84) -2076.55,1828.83 ; v2@-2082.76,1813.84 cw(c-2061.56,1813.84) -2076.55,1828.83 ; v2@-2082.76,1813.84 cw(c-2061.56,1813.84) -2076.55,1828.83 ; v2@-2082.76,1813.84 cw(c-2061.56,1813.84) -2076.55,1828.83 ; v2@-2082.76,1813.84 cw(c-2061.56,1813.84) -2076.55,1828.83 ; v2@-2082.76,1813.84 cw(c-2061.56,1813.84) -2076.55,1828.83 ; -2076.2,1829.18 ccw(c-2096.9,1849.88) U6.7@-2067.62,1849.88 ; -2076.2,1829.18 ccw(c-2096.9,1849.88) U6.7@-2067.62,1849.88 ; -2076.2,1829.18 ccw(c-2096.9,1849.88) U6.7@-2067.62,1849.88 ; -2076.2,1829.18 ccw(c-2096.9,1849.88) U6.7@-2067.62,1849.88 ; -2073.68,1318.84 cw(c-2073.68,1294.7) -2056.61,1311.77 ccw(c-2073.68,1294.7) -2073.68,1318.84 ; -2073.68,1318.84 ccw(c-2073.68,1342.98) -2056.61,1325.91 ; -2073.68,1318.84 ccw(c-2073.68,1342.98) -2056.61,1325.91 ; -2066.61,1215.91 cw(c-2066.61,1191.77) C50.2@-2049.54,1208.84 ; -2066.61,1215.91 ccw(c-2066.61,1240.06) C50.2@-2049.54,1222.98 ; -2066.61,1215.91 cw(c-2066.61,1191.77) C50.2@-2049.54,1208.84 ; -2066.61,1215.91 ccw(c-2066.61,1240.06) C50.2@-2049.54,1222.98 ; -2066.61,1215.91 cw(c-2066.61,1191.77) C50.2@-2049.54,1208.84 ; -2066.61,1215.91 ccw(c-2066.61,1240.06) C50.2@-2049.54,1222.98 ; -2066.61,1215.91 cw(c-2066.61,1191.77) C50.2@-2049.54,1208.84 ; -2066.61,1215.91 ccw(c-2066.61,1240.06) C50.2@-2049.54,1222.98 ; -2066.61,1215.91 ccw(c-2066.61,1240.06) C50.2@-2049.54,1222.98 ; -2066.61,1215.91 cw(c-2066.61,1191.77) C50.2@-2049.54,1208.84 ; -2066.61,1215.91 ccw(c-2066.61,1240.06) C50.2@-2049.54,1222.98 ; -2066.61,1215.91 cw(c-2066.61,1191.77) C50.2@-2049.54,1208.84 ; -2066.61,1215.91 ccw(c-2066.61,1240.06) C50.2@-2049.54,1222.98 ; -2066.61,1215.91 cw(c-2066.61,1191.77) C50.2@-2049.54,1208.84 ; -2063.94,1119.44 cw(c-2063.94,1095.3) C51.2@-2046.87,1112.37 ; -2063.94,1119.44 ccw(c-2063.94,1143.58) C51.2@-2046.87,1126.51 ; -2063.94,1119.44 cw(c-2063.94,1095.3) C51.2@-2046.87,1112.37 ; -2063.94,1119.44 ccw(c-2063.94,1143.58) C51.2@-2046.87,1126.51 ; -2063.94,1119.44 cw(c-2063.94,1095.3) C51.2@-2046.87,1112.37 ; -2063.94,1119.44 ccw(c-2063.94,1143.58) C51.2@-2046.87,1126.51 ; -2063.94,1119.44 cw(c-2063.94,1095.3) C51.2@-2046.87,1112.37 ; -2063.94,1119.44 ccw(c-2063.94,1143.58) C51.2@-2046.87,1126.51 ; -2063.94,1119.44 ccw(c-2063.94,1143.58) C51.2@-2046.87,1126.51 ; -2063.94,1119.44 cw(c-2063.94,1095.3) C51.2@-2046.87,1112.37 ; -2063.94,1119.44 ccw(c-2063.94,1143.58) C51.2@-2046.87,1126.51 ; -2063.94,1119.44 cw(c-2063.94,1095.3) C51.2@-2046.87,1112.37 ; -2063.94,1119.44 ccw(c-2063.94,1143.58) C51.2@-2046.87,1126.51 ; -2063.94,1119.44 cw(c-2063.94,1095.3) C51.2@-2046.87,1112.37 ; U6.7@-2059.13,1846.25 ccw(c-2062.76,1849.88) U6.7@-2057.62,1849.88 ; U6.7@-2059.13,1846.25 ccw(c-2062.76,1849.88) U6.7@-2057.62,1849.88 ; U6.7@-2059.13,1846.25 ccw(c-2062.76,1849.88) U6.7@-2057.62,1849.88 ; U6.7@-2059.13,1846.25 ccw(c-2062.76,1849.88) U6.7@-2057.62,1849.88 ; -2056.61,1325.91 ccw(c-2073.68,1342.98) -2049.54,1342.98 ; -2056.61,1325.91 ccw(c-2073.68,1342.98) -2049.54,1342.98 ; -2049.54,1342.98 ccw(c-2025.39,1342.98) -2042.46,1325.91 cw(c-2025.39,1342.98) -2049.54,1342.98 ; C43.2@-1857.61,710.77 cw(c-1874.68,693.7) -1850.54,693.7 ; C43.2@-1857.61,710.77 cw(c-1874.68,693.7) -1850.54,693.7 ; C43.2@-1857.61,710.77 cw(c-1874.68,693.7) -1850.54,693.7 ; C43.2@-1857.61,710.77 cw(c-1874.68,693.7) -1850.54,693.7 ; C43.2@-1857.61,710.77 cw(c-1874.68,693.7) -1850.54,693.7 ; C43.2@-1857.61,710.77 cw(c-1874.68,693.7) -1850.54,693.7 ; C43.2@-1857.61,710.77 cw(c-1874.68,693.7) -1850.54,693.7 ; C43.2@-1857.61,710.77 cw(c-1874.68,693.7) -1850.54,693.7 ; S6.2@-1850.77,2406.19 ccw(c-1892.97,2450.84) -1831.54,2450.84 ; S6.2@-1850.77,2406.19 ccw(c-1892.97,2450.84) -1831.54,2450.84 ; S6.2@-1850.77,2406.19 ccw(c-1892.97,2450.84) -1831.54,2450.84 ; S6.2@-1850.77,2406.19 ccw(c-1892.97,2450.84) -1831.54,2450.84 ; S6.2@-1850.77,2406.19 ccw(c-1892.97,2450.84) -1831.54,2450.84 ; S6.2@-1850.77,2406.19 ccw(c-1892.97,2450.84) -1831.54,2450.84 ; S6.2@-1850.77,2406.19 ccw(c-1892.97,2450.84) -1831.54,2450.84 ; S6.2@-1850.77,2406.19 ccw(c-1892.97,2450.84) -1831.54,2450.84 ; S6.2@-1850.77,2406.19 ccw(c-1892.97,2450.84) -1831.54,2450.84 ; -1850.54,693.7 cw(c-1826.39,693.7) C43.2@-1843.46,710.77 ; -1850.54,693.7 cw(c-1826.39,693.7) C43.2@-1843.46,710.77 ; -1850.54,693.7 cw(c-1826.39,693.7) C43.2@-1843.46,710.77 ; -1850.54,693.7 cw(c-1826.39,693.7) C43.2@-1843.46,710.77 ; -1850.54,693.7 cw(c-1826.39,693.7) C43.2@-1843.46,710.77 ; -1850.54,693.7 cw(c-1826.39,693.7) C43.2@-1843.46,710.77 ; -1850.54,693.7 cw(c-1826.39,693.7) C43.2@-1843.46,710.77 ; -1850.54,693.7 cw(c-1826.39,693.7) C43.2@-1843.46,710.77 ; S6.2@-1843.9,2398.92 ccw(c-1871.03,2427.63) -1831.54,2427.63 ; S6.2@-1843.9,2398.92 ccw(c-1871.03,2427.63) -1831.54,2427.63 ; S6.2@-1843.9,2398.92 ccw(c-1871.03,2427.63) -1831.54,2427.63 ; S6.2@-1843.9,2398.92 ccw(c-1871.03,2427.63) -1831.54,2427.63 ; S6.2@-1843.9,2398.92 ccw(c-1871.03,2427.63) -1831.54,2427.63 ; S6.2@-1843.9,2398.92 ccw(c-1871.03,2427.63) -1831.54,2427.63 ; S6.2@-1843.9,2398.92 ccw(c-1871.03,2427.63) -1831.54,2427.63 ; S6.2@-1843.9,2398.92 ccw(c-1871.03,2427.63) -1831.54,2427.63 ; S6.2@-1843.9,2398.92 ccw(c-1871.03,2427.63) -1831.54,2427.63 ; C43.2@-1843.46,710.77 cw(c-1826.39,693.7) -1826.39,717.84 ; C43.2@-1843.46,710.77 cw(c-1826.39,693.7) -1826.39,717.84 ; C43.2@-1843.46,710.77 cw(c-1826.39,693.7) -1826.39,717.84 ; C43.2@-1843.46,710.77 cw(c-1826.39,693.7) -1826.39,717.84 ; C43.2@-1843.46,710.77 cw(c-1826.39,693.7) -1826.39,717.84 ; C43.2@-1843.46,710.77 cw(c-1826.39,693.7) -1826.39,717.84 ; C43.2@-1843.46,710.77 cw(c-1826.39,693.7) -1826.39,717.84 ; C43.2@-1843.46,710.77 cw(c-1826.39,693.7) -1826.39,717.84 ; C43.2@-1843.46,710.77 cw(c-1826.39,693.7) -1826.39,717.84 ; C43.2@-1843.46,724.91 ccw(c-1826.39,741.98) -1826.39,717.84 ; C43.2@-1843.46,724.91 ccw(c-1826.39,741.98) -1826.39,717.84 ; C43.2@-1843.46,724.91 ccw(c-1826.39,741.98) -1826.39,717.84 ; C43.2@-1843.46,724.91 ccw(c-1826.39,741.98) -1826.39,717.84 ; C43.2@-1843.46,724.91 ccw(c-1826.39,741.98) -1826.39,717.84 ; C43.2@-1843.46,724.91 ccw(c-1826.39,741.98) -1826.39,717.84 ; C43.2@-1843.46,724.91 ccw(c-1826.39,741.98) -1826.39,717.84 ; C43.2@-1843.46,724.91 ccw(c-1826.39,741.98) -1826.39,717.84 ; C43.2@-1843.46,724.91 ccw(c-1826.39,741.98) -1826.39,717.84 ; -1837.74,2444.63 cw(c-1852.73,2429.65) -1831.54,2429.65 ; -1837.74,2444.63 cw(c-1852.73,2429.65) -1831.54,2429.65 ; -1837.74,2444.63 cw(c-1852.73,2429.65) -1831.54,2429.65 ; -1837.74,2444.63 cw(c-1852.73,2429.65) -1831.54,2429.65 ; -1837.74,2444.63 cw(c-1852.73,2429.65) -1831.54,2429.65 ; -1837.74,2444.63 cw(c-1852.73,2429.65) -1831.54,2429.65 ; -1837.74,2444.63 cw(c-1852.73,2429.65) -1831.54,2429.65 ; -1837.74,2444.63 cw(c-1852.73,2429.65) -1831.54,2429.65 ; -1831.54,2427.63 ccw(c-1792.04,2427.63) S6.2@-1819.17,2398.92 ; -1831.54,2427.63 ccw(c-1792.04,2427.63) S6.2@-1819.17,2398.92 ; -1831.54,2427.63 ccw(c-1792.04,2427.63) S6.2@-1819.17,2398.92 ; -1831.54,2427.63 ccw(c-1792.04,2427.63) S6.2@-1819.17,2398.92 ; -1831.54,2427.63 ccw(c-1792.04,2427.63) S6.2@-1819.17,2398.92 ; -1831.54,2427.63 ccw(c-1792.04,2427.63) S6.2@-1819.17,2398.92 ; -1831.54,2427.63 ccw(c-1792.04,2427.63) S6.2@-1819.17,2398.92 ; -1831.54,2427.63 ccw(c-1792.04,2427.63) S6.2@-1819.17,2398.92 ; -1831.54,2427.63 ccw(c-1792.04,2427.63) S6.2@-1819.17,2398.92 ; -1831.54,2429.65 cw(c-1810.34,2429.65) -1825.33,2444.63 ; -1831.54,2429.65 cw(c-1810.34,2429.65) -1825.33,2444.63 ; -1831.54,2429.65 cw(c-1810.34,2429.65) -1825.33,2444.63 ; -1831.54,2429.65 cw(c-1810.34,2429.65) -1825.33,2444.63 ; -1831.54,2429.65 cw(c-1810.34,2429.65) -1825.33,2444.63 ; -1831.54,2429.65 cw(c-1810.34,2429.65) -1825.33,2444.63 ; -1831.54,2429.65 cw(c-1810.34,2429.65) -1825.33,2444.63 ; -1831.54,2429.65 cw(c-1810.34,2429.65) -1825.33,2444.63 ; -1831.54,2450.84 ccw(c-1770.1,2450.84) S6.2@-1812.3,2406.19 ; -1831.54,2450.84 ccw(c-1770.1,2450.84) S6.2@-1812.3,2406.19 ; -1831.54,2450.84 ccw(c-1770.1,2450.84) S6.2@-1812.3,2406.19 ; -1831.54,2450.84 ccw(c-1770.1,2450.84) S6.2@-1812.3,2406.19 ; -1831.54,2450.84 ccw(c-1770.1,2450.84) S6.2@-1812.3,2406.19 ; -1831.54,2450.84 ccw(c-1770.1,2450.84) S6.2@-1812.3,2406.19 ; -1831.54,2450.84 ccw(c-1770.1,2450.84) S6.2@-1812.3,2406.19 ; -1831.54,2450.84 ccw(c-1770.1,2450.84) S6.2@-1812.3,2406.19 ; -1831.54,2450.84 ccw(c-1770.1,2450.84) S6.2@-1812.3,2406.19 ; -1831.54,2450.84 S6.2@-1831.54,2385.84 -1767.54,2385.84 ; C20.2@-1822.46,2172.77 cw(c-1805.39,2155.7) -1805.39,2179.84 ; C20.2@-1822.46,2172.77 cw(c-1805.39,2155.7) -1805.39,2179.84 ; C20.2@-1822.46,2172.77 cw(c-1805.39,2155.7) -1805.39,2179.84 ; C20.2@-1822.46,2172.77 cw(c-1805.39,2155.7) -1805.39,2179.84 ; C20.2@-1822.46,2172.77 cw(c-1805.39,2155.7) -1805.39,2179.84 ; C20.2@-1822.46,2172.77 cw(c-1805.39,2155.7) -1805.39,2179.84 ; C20.2@-1822.46,2172.77 cw(c-1805.39,2155.7) -1805.39,2179.84 ; C20.2@-1822.46,2172.77 cw(c-1805.39,2155.7) -1805.39,2179.84 ; C20.2@-1822.46,2172.77 cw(c-1805.39,2155.7) -1805.39,2179.84 ; C20.2@-1822.46,2186.91 ccw(c-1805.39,2203.98) -1805.39,2179.84 ; C20.2@-1822.46,2186.91 ccw(c-1805.39,2203.98) -1805.39,2179.84 ; C20.2@-1822.46,2186.91 ccw(c-1805.39,2203.98) -1805.39,2179.84 ; C20.2@-1822.46,2186.91 ccw(c-1805.39,2203.98) -1805.39,2179.84 ; C20.2@-1822.46,2186.91 ccw(c-1805.39,2203.98) -1805.39,2179.84 ; C20.2@-1822.46,2186.91 ccw(c-1805.39,2203.98) -1805.39,2179.84 ; C20.2@-1822.46,2186.91 ccw(c-1805.39,2203.98) -1805.39,2179.84 ; C20.2@-1822.46,2186.91 ccw(c-1805.39,2203.98) -1805.39,2179.84 ; C20.2@-1822.46,2186.91 ccw(c-1805.39,2203.98) -1805.39,2179.84 ; S6.2@-1784.93,2374.52 cw(c-1767.54,2366.83) -1767.54,2385.84 ; S6.2@-1784.93,2374.52 cw(c-1767.54,2366.83) -1767.54,2385.84 ; S6.2@-1784.93,2374.52 cw(c-1767.54,2366.83) -1767.54,2385.84 ; S6.2@-1784.93,2374.52 cw(c-1767.54,2366.83) -1767.54,2385.84 ; S6.2@-1784.93,2374.52 cw(c-1767.54,2366.83) -1767.54,2385.84 ; S6.2@-1784.93,2374.52 cw(c-1767.54,2366.83) -1767.54,2385.84 ; S6.2@-1784.93,2374.52 cw(c-1767.54,2366.83) -1767.54,2385.84 ; S6.2@-1784.93,2374.52 cw(c-1767.54,2366.83) -1767.54,2385.84 ; S6.2@-1784.93,2374.52 cw(c-1767.54,2366.83) -1767.54,2385.84 ; S6.2@-1784.93,2397.17 ccw(c-1767.54,2404.86) -1767.54,2385.84 ; S6.2@-1784.93,2397.17 ccw(c-1767.54,2404.86) -1767.54,2385.84 ; S6.2@-1784.93,2397.17 ccw(c-1767.54,2404.86) -1767.54,2385.84 ; S6.2@-1784.93,2397.17 ccw(c-1767.54,2404.86) -1767.54,2385.84 ; S6.2@-1784.93,2397.17 ccw(c-1767.54,2404.86) -1767.54,2385.84 ; S6.2@-1784.93,2397.17 ccw(c-1767.54,2404.86) -1767.54,2385.84 ; S6.2@-1784.93,2397.17 ccw(c-1767.54,2404.86) -1767.54,2385.84 ; S6.2@-1784.93,2397.17 ccw(c-1767.54,2404.86) -1767.54,2385.84 ; S6.2@-1784.93,2397.17 ccw(c-1767.54,2404.86) -1767.54,2385.84 ; -1774.68,717.84 cw(c-1774.68,693.7) C41.2@-1757.61,710.77 ; -1774.68,717.84 ccw(c-1774.68,741.98) C41.2@-1757.61,724.91 ; -1774.68,717.84 cw(c-1774.68,693.7) C41.2@-1757.61,710.77 ; -1774.68,717.84 ccw(c-1774.68,741.98) C41.2@-1757.61,724.91 ; -1774.68,717.84 cw(c-1774.68,693.7) C41.2@-1757.61,710.77 ; -1774.68,717.84 ccw(c-1774.68,741.98) C41.2@-1757.61,724.91 ; -1774.68,717.84 cw(c-1774.68,693.7) C41.2@-1757.61,710.77 ; -1774.68,717.84 ccw(c-1774.68,741.98) C41.2@-1757.61,724.91 ; -1774.68,717.84 cw(c-1774.68,693.7) C41.2@-1757.61,710.77 ; -1774.68,717.84 ccw(c-1774.68,741.98) C41.2@-1757.61,724.91 ; -1774.68,717.84 ccw(c-1774.68,741.98) C41.2@-1757.61,724.91 ; -1774.68,717.84 cw(c-1774.68,693.7) C41.2@-1757.61,710.77 ; -1774.68,717.84 ccw(c-1774.68,741.98) C41.2@-1757.61,724.91 ; -1774.68,717.84 cw(c-1774.68,693.7) C41.2@-1757.61,710.77 ; -1774.68,717.84 ccw(c-1774.68,741.98) C41.2@-1757.61,724.91 ; -1774.68,717.84 cw(c-1774.68,693.7) C41.2@-1757.61,710.77 ; -1774.68,717.84 ccw(c-1774.68,741.98) C41.2@-1757.61,724.91 ; -1774.68,717.84 cw(c-1774.68,693.7) C41.2@-1757.61,710.77 ; C41.2@-1743.46,710.77 cw(c-1726.39,693.7) -1726.39,717.84 ; C41.2@-1743.46,710.77 cw(c-1726.39,693.7) -1726.39,717.84 ; C41.2@-1743.46,710.77 cw(c-1726.39,693.7) -1726.39,717.84 ; C41.2@-1743.46,710.77 cw(c-1726.39,693.7) -1726.39,717.84 ; C41.2@-1743.46,710.77 cw(c-1726.39,693.7) -1726.39,717.84 ; C41.2@-1743.46,710.77 cw(c-1726.39,693.7) -1726.39,717.84 ; C41.2@-1743.46,710.77 cw(c-1726.39,693.7) -1726.39,717.84 ; C41.2@-1743.46,710.77 cw(c-1726.39,693.7) -1726.39,717.84 ; C41.2@-1743.46,710.77 cw(c-1726.39,693.7) -1726.39,717.84 ; C41.2@-1743.46,724.91 ccw(c-1726.39,741.98) -1726.39,717.84 ; C41.2@-1743.46,724.91 ccw(c-1726.39,741.98) -1726.39,717.84 ; C41.2@-1743.46,724.91 ccw(c-1726.39,741.98) -1726.39,717.84 ; C41.2@-1743.46,724.91 ccw(c-1726.39,741.98) -1726.39,717.84 ; C41.2@-1743.46,724.91 ccw(c-1726.39,741.98) -1726.39,717.84 ; C41.2@-1743.46,724.91 ccw(c-1726.39,741.98) -1726.39,717.84 ; C41.2@-1743.46,724.91 ccw(c-1726.39,741.98) -1726.39,717.84 ; C41.2@-1743.46,724.91 ccw(c-1726.39,741.98) -1726.39,717.84 ; C41.2@-1743.46,724.91 ccw(c-1726.39,741.98) -1726.39,717.84 ; v2@-1727.54,1520.06 cw(c-1727.54,1498.87) -1712.55,1513.85 ; v2@-1727.54,1520.06 cw(c-1727.54,1498.87) -1712.55,1513.85 ; v2@-1727.54,1520.06 cw(c-1727.54,1498.87) -1712.55,1513.85 ; v2@-1727.54,1520.06 cw(c-1727.54,1498.87) -1712.55,1513.85 ; v2@-1727.54,1520.06 cw(c-1727.54,1498.87) -1712.55,1513.85 ; v2@-1727.54,1520.06 cw(c-1727.54,1498.87) -1712.55,1513.85